# Altium PCB PCB_STM32F401RET6-MINI_2_2022-10-27.pcbdoc
Units mil, origin at the board's own origin, x right, y up, seen from the top; angles counter-clockwise.
Board outline 3639.41 x 2810 mil, 2 copper layers (Top Layer, Bottom Layer); 56 components, 52 nets, 269 pads, 65 vias.
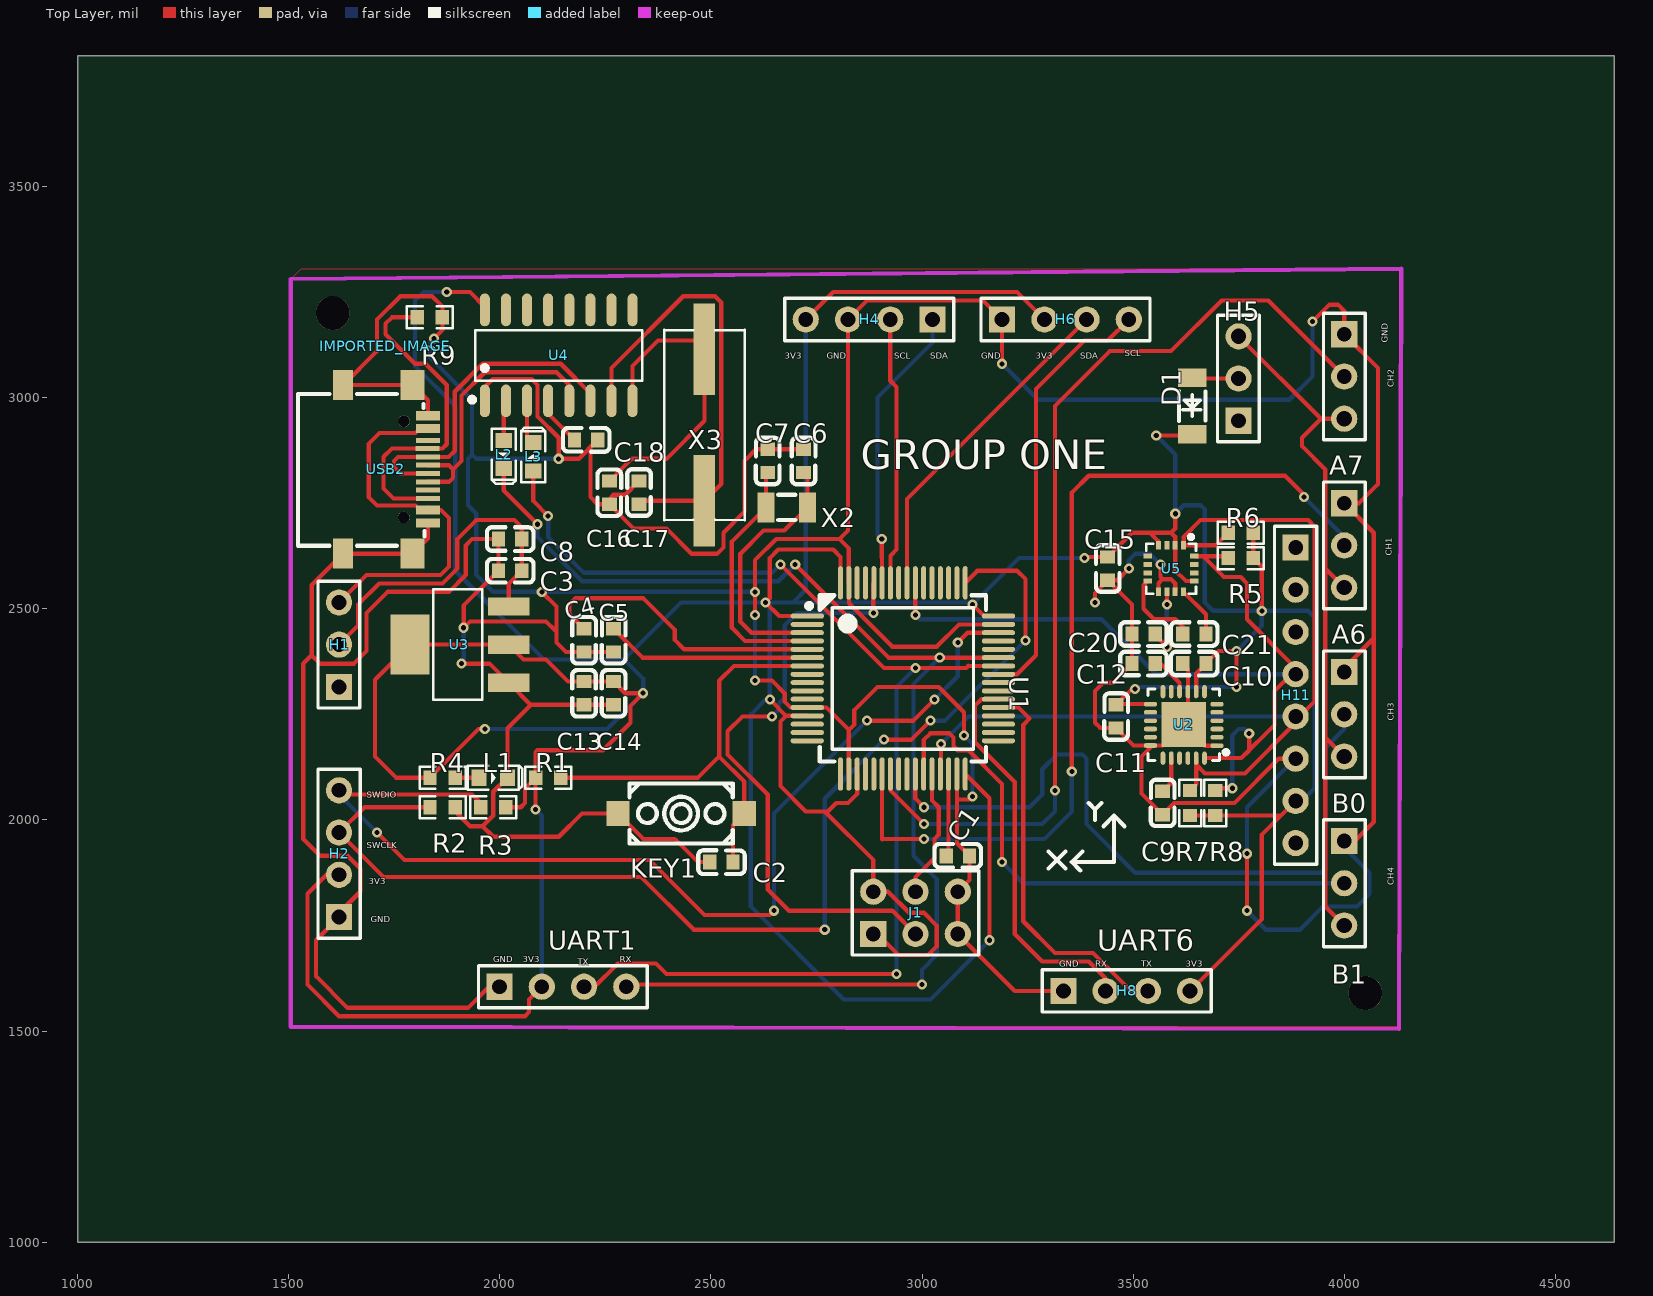
[diagram p0: Top Layer view]
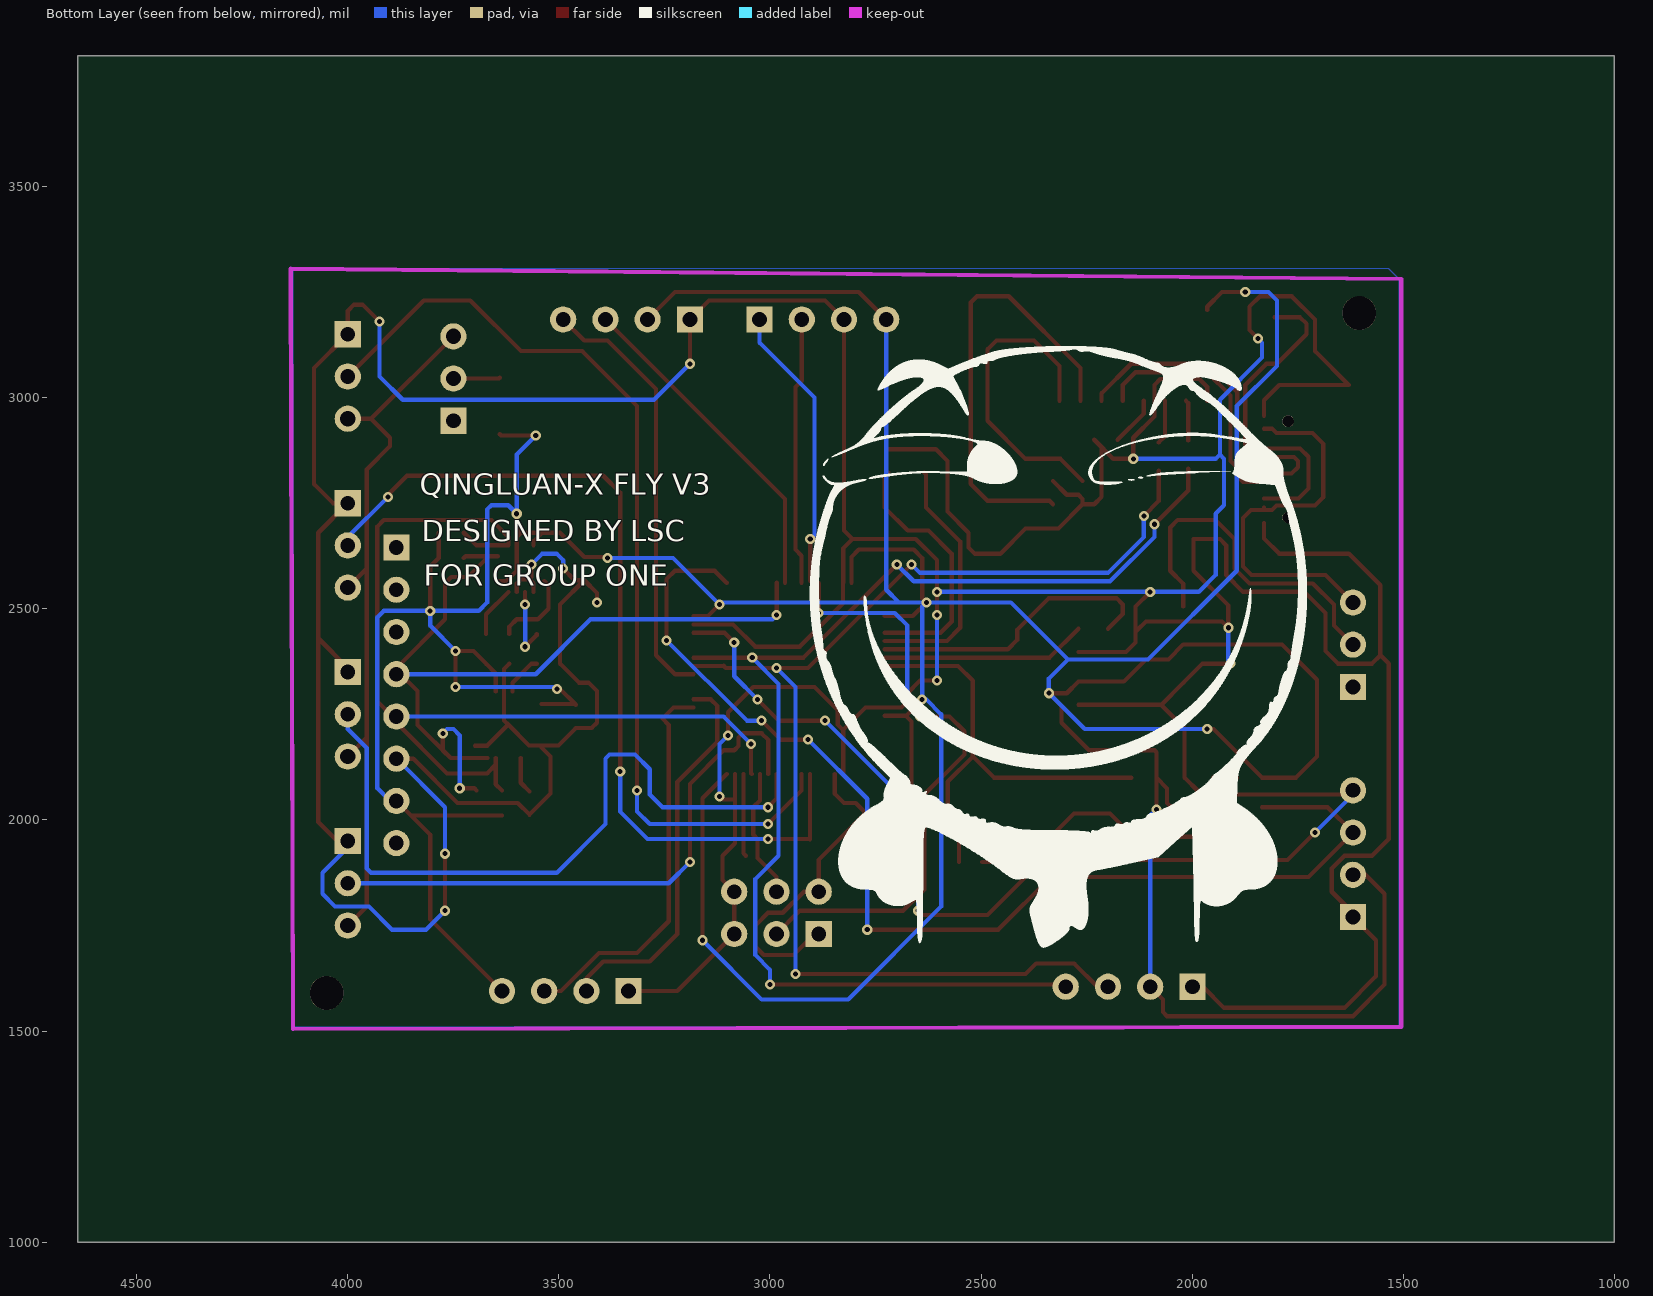
[diagram p1: Bottom Layer view, seen from below]

## Layer stack, top to bottom
Top Layer: signal copper (thickness not stored)
Dielectric: dielectric 12.6, FR-4, Dk 4.8
Bottom Layer: signal copper (thickness not stored)

## Board outline
4639.41,1000 1000,1000 1000,3810 4639.41,3810

## Components (designator, comment, footprint, x,y, rotation, side; value= is the part's Value field where it differs from the comment)
A6 "HDR-F-2.54_1x3" HDR-F-2.54_1X3 3999.41,2650 r270 top
A7 "HDR-F-2.54_1x3" HDR-F-2.54_1X3 3999.41,3050 r270 top
B0 "HDR-F-2.54_1x3" HDR-F-2.54_1X3 3999.41,2250 r270 top
B1 "HDR-F-2.54_1x3" HDR-F-2.54_1X3 3999.41,1850 r270 top
C1 "4.7uF" C0603 3084.41,1915 r0 top
C2 "0.1u" C0603 2524.41,1900 r180 top
C3 "0.1u" C0603 2024.41,2590 r180 top
C4 "22pF" C0603 2199.41,2425 r270 top
C5 "22pF" C0603 2269.41,2425 r270 top
C6 "15pF" C0603 2719.41,2850 r90 top
C7 "15pF" C0603 2634.41,2850 r90 top
C8 "0.1u" C0603 2024.41,2665 r180 top
C9 "2.2nF" C0603 3569.41,2040 r270 top
C10 "10nF" C0603 3644.41,2370 r0 top
C11 "0.1u" C0603 3459.41,2245 r90 top
C12 "0.1u" C0603 3524.41,2370 r0 top
C13 "0.1u" C0603 2199.41,2300 r90 top
C14 "0.1u" C0603 2269.41,2300 r90 top
C15 "0.1u" C0603 3439.41,2595 r270 top
C16 "22pF" C0603 2259.41,2775 r90 top
C17 "22pF" C0603 2329.41,2775 r270 top
C18 "0.1u" C0603 2204.41,2900 r180 top
C20 "4.7uF" C0603 3524.41,2440 r0 top
C21 "0.22uF" C0603 3644.41,2440 r0 top
D1 "ZMM3V3" LL-34_L3.5-W1.5-RD 3639.41,2980 r90 top
H1 "HDR-F-2.54_1x3" HDR-F-2.54_1X3 1619.41,2415 r90 top
H2 "HDR-F-2.54_1x4" HDR-F-2.54_1X4 1619.41,1920 r90 top
H4 "HDR-F-2.54_1x4" HDR-F-2.54_1X4 2874.41,3185 r180 top
H5 "HDR-F-2.54_1x3" HDR-F-2.54_1X3 3749.41,3045 r90 top
H6 "HDR-F-2.54_1x4" HDR-F-2.54_1X4 3339.41,3185 r0 top
H8 "HDR-F-2.54_1x4" HDR-F-2.54_1X4 3484.41,1595 r0 top
H11 "HDR-F-2.54_1x8" HDR-F-2.54_1X8 3884.41,2345 r270 top
IMPORTED_IMAGE "IMPORTED_IMAGE" IMPORTED_IMAGE 1728.19,3121.78 r0 top
J1 "HDR-M-2.54_2x3" HDR-M-2.54_2X3 2884.41,1730 r0 top
KEY1 "K2-3.6×6.1_SMD" KEY-SMD_2P-L6.2-W3.6-LS8.0 2429.41,2015 r180 top
L1 "LED-0603_R" LED0603_RED 1984.41,2100 r0 top
L2 "LED-0603_B" LED0603_BLUE 2009.41,2865 r270 top
L3 "LED-0603_G" LED0603_GREEN 2079.41,2860 r90 top
R1 "100k" R0603 2114.41,2100 r0 top
R2 "10k" R0603 1864.41,2030 r180 top
R3 "10k" R0603 1984.41,2030 r180 top
R4 "1k" R0603 1864.41,2100 r0 top
R5 "2.2K" R0603 3754.41,2620 r0 top
R6 "2.2k" R0603 3754.41,2680 r0 top
R7 "4.7k" R0603 3634.41,2040 r270 top
R8 "4.7k" R0603 3694.41,2040 r270 top
R9 "5.1k" R0603 1834.41,3190 r0 top
U1 "STM32F401RET6" LQFP-64_L10.0-W10.0-P0.50-LS12.0-BL 2954.41,2335 r270 top
U2 "MPU6050-YJLTY" QFN-24_L4.0-W4.0-P0.50-BL-EP2.7 3619.41,2225 r90 top
U3 "AMS1117-3.3" SOT-223-3_L6.5-W3.4-P2.30-LS7.0-BR 1904.41,2415 r0 top
U4 "CH340G" SOIC-16_L9.9-W3.9-P1.27-LS6.0-BL 2139.41,3100 r0 top
U5 "HMC5883L" LPCC-16_L3.0-W3.0-P0.50-BL 3589.41,2595 r180 top
UART1 "HDR-F-2.54_1x4" HDR-F-2.54_1X4 2149.41,1605 r0 top
USB2 "TYPEC-304S-ACP16" USB-C-SMD_TYPEC-304S-ACP16 1729.41,2830 r270 top
X2 "32.768kHz" FC-135R_L3.2-W1.5 2679.41,2740 r0 top
X3 "12MHz" HC-49S_L11.4-W4.8 2484.41,2935 r90 top

## Footprints (in the part's own frame and the unit in brackets; to place one, negate y for a bottom-side part, rotate by r counter-clockwise, add the part's x,y. Pads: shape width x height; smd on the part's side, far side on the other; paste and mask are expansions set on the pad)
C0603 [mm]
  rect 0.8x0.9 smd: 1(-0.7,0) 2(0.7,0)
  silkscreen extent -1.41,-0.71 1.39,0.72
FC-135R_L3.2-W1.5 [mm]
  rect 1x1.8 smd: 1(-1.25,0) 2(1.25,0)
  silkscreen extent -0.51,-0.76 0.51,0.76
HC-49S_L11.4-W4.8 [mm]
  rect 5.5x1.3 smd: 1(-4.553,0) 2(4.553,0)
  silkscreen extent -5.71,-2.41 5.71,2.41
HDR-F-2.54_1X3 [mil]
  rect 62x62 hole 35: 1(-100,0)
  round 62 hole 35: 2(0,0)
  round 62 hole 36: 3(100,0)
  silkscreen extent -150,-49 150,50
HDR-F-2.54_1X4 [mil]
  rect 62x62 hole 35: 1(-150,0)
  round 62 hole 35: 2(-50,0) 3(50,0) 4(150,0)
  silkscreen extent -200,-50 200,50
HDR-F-2.54_1X8 [mil]
  rect 62x62 hole 35: 1(-300,0)
  round 62 hole 35: 2(-200,0) 3(-100,0) 4(0,0) 5(100,0) 6(200,0) 7(300,0) 8(400,0)
  silkscreen extent -350,-50 450,50
HDR-M-2.54_2X3 [mil]
  rect 62x62 hole 35: 1(0,0)
  round 62 hole 35: 2(0,100) 3(100,0) 4(100,100) 5(200,0) 6(200,100)
  silkscreen extent -50,-50 250,150
IMPORTED_IMAGE [mil]
KEY-SMD_2P-L6.2-W3.6-LS8.0 [mm]
  rect 1.4x1.5 smd: 1(-3.8,0) 2(3.8,0)
  silkscreen extent -3.1,-1.8 3.1,1.8
LED0603_BLUE [mm]
  rect 0.9x1 smd: 1(-0.85,0) 2(0.85,0)
  silkscreen extent -1.54,-0.73 1.75,0.73
LED0603_GREEN [mm]
  rect 0.9x1 smd: 1(-0.85,0) 2(0.85,0)
  silkscreen extent -1.54,-0.73 1.75,0.73
LED0603_RED [mm]
  rect 0.9x1 smd: 1(-0.85,0) 2(0.85,0)
  silkscreen extent -1.54,-0.73 1.75,0.73
LL-34_L3.5-W1.5-RD [mm]
  rect 1.1x1.7 smd: 1(-1.7,0) 2(1.7,0)
  silkscreen extent -0.9,-0.8 0.9,0.8
LPCC-16_L3.0-W3.0-P0.50-BL [mm]
  rect 0.3x0.5 smd: 1(-0.749,-1.4) 2(-0.249,-1.4) 3(0.251,-1.4) 4(0.751,-1.4) 9(0.75,1.4) 10(0.25,1.4) 11(-0.25,1.4) 12(-0.751,1.4)
  rect 0.5x0.3 smd: 5(1.4,-0.748) 6(1.4,-0.248) 7(1.4,0.252) 8(1.4,0.752) 13(-1.4,0.752) 14(-1.4,0.252) 15(-1.4,-0.248) 16(-1.4,-0.748)
  silkscreen extent -1.5,-2.02 1.5,1.5
LQFP-64_L10.0-W10.0-P0.50-LS12.0-BL [mm]
  oval 0.3x2 smd: 1(-3.75,-5.75) 2(-3.25,-5.75) 3(-2.75,-5.75) 4(-2.25,-5.75) 5(-1.75,-5.75) 6(-1.25,-5.75) 7(-0.75,-5.75) 8(-0.25,-5.75) 9(0.25,-5.75) 10(0.75,-5.75) 11(1.25,-5.75) 12(1.75,-5.75) 13(2.25,-5.75) 14(2.75,-5.75) 15(3.25,-5.75) 16(3.75,-5.75) 33(3.75,5.75) 34(3.25,5.75) 35(2.75,5.75) 36(2.25,5.75) 37(1.75,5.75) 38(1.25,5.75) 39(0.75,5.75) 40(0.25,5.75) 41(-0.25,5.75) 42(-0.75,5.75) 43(-1.25,5.75) 44(-1.75,5.75) 45(-2.25,5.75) 46(-2.75,5.75) 47(-3.25,5.75) 48(-3.75,5.75)
  oval 2x0.3 smd: 17(5.75,-3.75) 18(5.75,-3.25) 19(5.75,-2.75) 20(5.75,-2.25) 21(5.75,-1.75) 22(5.75,-1.25) 23(5.75,-0.75) 24(5.75,-0.25) 25(5.75,0.25) 26(5.75,0.75) 27(5.75,1.25) 28(5.75,1.75) 29(5.75,2.25) 30(5.75,2.75) 31(5.75,3.25) 32(5.75,3.75) 49(-5.75,3.75) 50(-5.75,3.25) 51(-5.75,2.75) 52(-5.75,2.25) 53(-5.75,1.75) 54(-5.75,1.25) 55(-5.75,0.75) 56(-5.75,0.25) 57(-5.75,-0.25) 58(-5.75,-0.75) 59(-5.75,-1.25) 60(-5.75,-1.75) 61(-5.75,-2.25) 62(-5.75,-2.75) 63(-5.75,-3.25) 64(-5.75,-3.75)
  silkscreen extent -5,-5.79 5,5
QFN-24_L4.0-W4.0-P0.50-BL-EP2.7 [mm]
  oval 0.28x0.8 smd: 1(-1.25,-2) 2(-0.75,-2) 3(-0.25,-2) 4(0.25,-2) 5(0.75,-2) 6(1.25,-2) 13(1.25,2) 14(0.75,2) 15(0.25,2) 16(-0.25,2) 17(-0.75,2) 18(-1.242,2)
  oval 0.8x0.28 smd: 7(2,-1.25) 8(2,-0.75) 9(2,-0.25) 10(2,0.25) 11(2,0.75) 12(2,1.25) 19(-2,1.25) 20(-2,0.75) 21(-2,0.25) 22(-2,-0.25) 23(-2,-0.75) 24(-2,-1.25)
  rect 2.7x2.7 smd: 25(0.012,0)
  silkscreen extent -2.14,-2.79 2.16,2.15
R0603 [mil]
  rect 31.75x34.02 smd: 1(-29.65,0) 2(29.66,0)
  silkscreen extent -55,-26 55,26
SOIC-16_L9.9-W3.9-P1.27-LS6.0-BL [mil]
  oval 23.7x77.6 smd: 1(-175,-107.7) 2(-125,-107.7) 3(-75,-107.7) 4(-25,-107.7) 5(25,-107.7) 6(75,-107.7) 7(125,-107.7) 8(175,-107.7) 9(175,107.7) 10(125,107.7) 11(75,107.7) 12(25,107.7) 13(-25,107.7) 14(-75,107.7) 15(-125,107.7) 16(-175,107.7)
  silkscreen extent -211,-111 198,60
SOT-223-3_L6.5-W3.4-P2.30-LS7.0-BR [mm]
  rect 2.5x1.1 smd: 1(2.97,-2.3) 2(2.97,0) 3(2.97,2.3)
  rect 2.34x3.6 smd: 4(-2.97,0)
  silkscreen extent -1.57,-3.33 1.37,3.33
USB-C-SMD_TYPEC-304S-ACP16 [mm]
  rect 1.8x1.45 smd: 13(-5.07,1.632) 14(5.07,1.632)
  rect 1.8x1.2 smd: 15(-5.07,-2.548) 16(5.07,-2.548)
  rect 0.55x1.45 smd: A1B12(-3.225,2.547) A4B9(-2.45,2.547) B1A12(3.22,2.547) B4A9(2.45,2.547)
  rect 0.3x1.45 smd: A5(-1.26,2.532) A6(-0.25,2.547) A7(0.25,2.547) A8(1.25,2.547) B5(1.75,2.547) B6(0.75,2.547) B7(-0.75,2.547) B8(-1.75,2.547)
  round 0.7 hole 0.7 unplated: ""(-2.89,1.103) ""(2.89,1.103)
  silkscreen extent -4.54,-5.26 4.6,2.35

## Free pads (board coordinates)
  round 80 hole 80 unplated: ""(1604.41,3200) ""(4049.41,1590)

## Via types
v1: diameter 24, hole 12, Top Layer to Bottom Layer, tented both sides, 65 vias

## Nets (pads, with @x,y where several pads share a name; then routed paths per layer and width w, separated by ;. In a path a pad name is that pad's centre, name@x,y a point inside that pad or via, vN(x,y) a via of type N, cw(c..) or ccw(c..) an arc to the next point about the centre after c; other vN are vias at no path point)
3.3V: C10.2 C11.2 C13.2 C14.2 C15.1 D1.1 H2.2 H4.4 H6.2 H8.4 H11.7 J1.1 J1.2 R1.1 R3.1 R4.1 R5.2 R6.2 R7.2 R8.2 U1.1 U1.13 U1.19 U1.32 U1.48 U1.64 U2.8 U2.13 U3.2 U3.4 U4.16 U5.2 U5.4 U5.13 UART1.2 | length 14740.4
  Top Layer w10: H2.2 1589.41,1870 1544.41,1825 1544.41,1610 1619.41,1535 2059.41,1535 2069.41,1545 2069.41,1575 UART1.2 ; v1(1874.41,3250) 1929.41,3250 1964.41,3215 U4.16 ; v1(1964.41,2215) 1949.75,2215 R4.1 1754.41,2100 1704.41,2150 1704.41,2331.93 U3.4 U3.2 2056.33,2380 2109.41,2380 2161.85,2327.56 C13.2 C14.2 2296.97,2300 v1(2339.41,2300) 2309.41,2270 2309.41,2230 2244.41,2165 2089.41,2165 2084.75,2160.34 R1.1 2059.41,2074.66 2059.41,2040 2049.41,2030 R3.1 ; v1(2084.41,2025) R1.1@2084.71,2100 ; v1(2639.41,2285) 2677.99,2246.42 ; H4.4 2789.41,3250 3224.41,3250 H6.2 ; U1.13 2677.99,2246.42 ; U1.1 2661.77,2482.64 v1(2629.41,2515) 2639.41,2525 2639.41,2620 2659.41,2640 2789.41,2640 2806.77,2622.64 U1.64 ; 2772.98,2016.43 2796.55,2040 2824.41,2040 2846.14,2061.73 U1.19 ; J1.1 2894.41,1730 2944.41,1680 3014.41,1680 3034.41,1700 3034.41,1750 3004.41,1780 2969.41,1780 2919.41,1830 J1.2 2884.41,1905 2769.41,2020 2724.41,2020 2664.41,2080 2664.41,2232.84 2677.99,2246.42 ; U1.32 3159.41,2051.27 v1(3159.41,1715) ; v1(3119.41,2510) 3146.77,2482.64 U1.48 ; v1(3384.41,2620) 3386.97,2622.56 C15.1 3496.85,2680 3539.41,2680 ; v1(3504.41,2310) 3496.85,2310 C11.2 3461.06,2274.21 U2.13 ; v1(3554.41,2910) 3636.34,2910 D1.1 ; U5.4 3559.83,2659.58 3539.41,2680 ; v1(3599.41,2725) 3599.41,2690 3589.41,2680 ; H8.4 3804.41,1765 3804.41,1965 3849.75,2010.34 ; R7.2 R8.2 3849.75,2010.34 ; U5.13 3624.81,2565.4 3599.21,2590.2 U5.2 3599.2,2670.21 3589.41,2680 ; U2.8 3648.94,2346.97 C10.2 3701.97,2400 v1(3744.41,2400) v1(3744.41,2315) ; R6.2 R5.2 3804.3,2599.77 v1(3804.3,2495) ; H11.7 3849.75,2010.34 ; 3539.41,2680 3589.41,2680
  Bottom Layer w10: v1(1874.41,3250) 1819.41,3250 1799.41,3230 1799.41,3075 1894.41,2980 1894.41,2590 2104.41,2380 2294.41,2380 ; v1(1964.41,2215) 2254.41,2215 v1(2339.41,2300) 2339.41,2335 2294.41,2380 ; v1(2084.41,2025) 2099.41,2010 UART1.2 ; H4.4 2724.41,2545 2694.41,2515 v1(2629.41,2515) ; v1(3159.41,1715) 3019.41,1575 2814.41,1575 2594.41,1795 2594.41,2250 2629.41,2285 v1(2639.41,2285) 2639.41,2505 v1(2629.41,2515) ; v1(3384.41,2620) 3229.41,2620 v1(3119.41,2510) 3119.41,2515 v1(2629.41,2515) ; v1(3504.41,2310) 3509.41,2315 v1(3744.41,2315) ; v1(3554.41,2910) 3599.41,2865 v1(3599.41,2725) 3619.41,2745 3659.41,2745 3669.41,2735 3669.41,2515 3689.41,2495 v1(3804.3,2495) ; v1(3744.41,2400) 3804.3,2459.89 v1(3804.3,2495) ; H11.7 3899.41,2045 3929.41,2075 3929.41,2480 3914.41,2495 v1(3804.3,2495) ; 2294.41,2380 2429.41,2515 v1(2629.41,2515)
5V: C3.1 C8.1 H1.2 U3.3 | length 831.9
  Top Layer w10: H1.2 1664.41,2460 1664.41,2510 1714.41,2560 1864.41,2560 1899.41,2595 1899.41,2665 1944.41,2710 2034.41,2710 2051.97,2692.44 C8.1 C3.1 2021.33,2559.36 U3.3
BOOT0: J1.3 U1.60 | length 1449
  Top Layer w10: v1(2644.41,2245) 2574.41,2245 2539.41,2210 2539.41,2155 2634.41,2060 2634.41,1835 2684.41,1785 2929.41,1785 J1.3 ; v1(2884.41,2490) 2884.41,2560.27 U1.60
  Bottom Layer w10: v1(2644.41,2245) 2660.77,2261.36 2660.77,2276.36 2674.41,2290 2674.41,2460 2704.41,2490 v1(2884.41,2490)
BOOT1: J1.4 U1.28 | length 308.1
  Top Layer w10: J1.4 2984.41,1865 3029.41,1910 3029.41,1955 3039.41,1965 3039.41,2030 3023.31,2046.1 U1.28
C16_2: C16.2 U4.8 X3.2 | length 739.4
  Top Layer w10: C16.2 2311.81,2855 2394.41,2855 2484.41,2945 X3.2 ; U4.8 2314.41,3075 2374.41,3135 2463.66,3135 X3.2@2484.41,3114.25
C17_2: C17.2 U4.7 X3.1 | length 1058.6
  Top Layer w10: U4.7 2264.41,3070 2434.41,3240 2509.41,3240 2524.41,3225 2524.41,2795.75 2484.41,2755.75 2337.72,2755.75 C17.2
C18_2: C18.2 U4.4 | length 118.2
  Top Layer w10: U4.4 2114.41,2962.44 C18.2@2176.85,2900
CC: R9.1 USB2.A5 USB2.B5 | length 793.9
  Top Layer w10: R9.1 1744.41,3190 1729.41,3175 1729.41,3150 1799.41,3080 1824.41,3080 1874.41,3030 1874.41,2889.61 1864.41,2879.61 USB2.A5 1744.81,2879.6 1724.41,2860 1724.41,2785 1748.31,2761.1 USB2.B5
CH1: A6.2 U1.22 | length 2130.4
  Top Layer w10: U1.22 2905.2,1954.21 2905.99,1955 v1(3004.41,1955) ; v1(3354.41,2115) 3354.41,2775 3394.41,2815 3859.41,2815 3904.41,2770 v1(3904.41,2765)
  Bottom Layer w10: v1(3004.41,1955) 3289.41,1955 3354.41,2020 v1(3354.41,2115) ; v1(3904.41,2765) 3999.41,2670 A6.2
CH2: A7.2 U1.23 | length 2297.1
  Top Layer w10: U1.23 2924.88,2069.53 v1(3004.41,1990) ; v1(3314.41,2070) 3314.41,2980 3444.41,3110 3589.41,3110 3709.41,3230 3819.41,3230 A7.2
  Bottom Layer w10: v1(3004.41,1990) 3284.41,1990 3314.41,2020 v1(3314.41,2070)
CH3: B0.2 U1.26 | length 1718.6
  Top Layer w10: U1.26 2983.94,2050.47 v1(3004.41,2030)
  Bottom Layer w10: v1(3004.41,2030) 3254.41,2030 3284.41,2060 3284.41,2120 3319.41,2155 3379.41,2155 3389.41,2145 3389.41,1990 3504.41,1875 3944.41,1875 3954.41,1885 3954.41,2170 3999.41,2215 B0.2
CH4: B1.2 U1.27 | length 1350
  Top Layer w10: U1.27 3003.62,2189.21 3019.41,2205 3029.41,2205 3064.41,2205 3074.41,2195 3074.41,2175 3084.41,2165 3109.41,2165 3189.41,2085 v1(3189.41,1900)
  Bottom Layer w10: v1(3189.41,1900) 3239.41,1850 B1.2
D+: U4.5 USB2.A6 USB2.B6 | length 665
  Top Layer w10: USB2.B6 1879.88,2800.47 1889.41,2810 1889.41,2830 ; USB2.A6 1879.57,2839.84 1889.41,2830 ; 1889.41,2823.6 1889.41,2830 ; U4.5 2164.41,3030 2134.41,3060 1964.41,3060 1909.41,3005 1909.41,2850 1889.41,2830
D-: U4.6 USB2.A7 USB2.B7 | length 790.3
  Top Layer w10: USB2.A7 1764.61,2820.2 1749.41,2835 1749.41,2850 1758.91,2859.5 USB2.B7 1878.91,2859.5 1893.31,2873.9 1893.31,3013.9 1959.41,3080 2144.41,3080 2214.41,3010 U4.6
DIN: A6.3 A7.3 B0.3 B1.3 H5.3 | length 1718.1
  Top Layer w10: H5.3 3944.41,2950 ; B1.3 3954.41,1795 3954.41,2195 ; B0.3 3954.41,2195 ; A6.3 3954.41,2595 ; A7.3 3944.41,2950 ; 3944.41,2950 3899.41,2905 3899.41,2885 3954.41,2830 3954.41,2595 ; 3954.41,2195 3954.41,2595
GND: A6.1 A7.1 B0.1 B1.1 C1.2 C2.2 C3.2 C4.2 C5.2 C6.2 C7.2 C8.2 C9.2 C10.1 C11.1 C12.1 C13.1 C14.1 C15.2 C16.1 C17.1 C18.1 C20.1 H2.1 H4.3 H6.1 H8.1 H11.6 J1.5 J1.6 KEY1.2 L1.2 R2.1 R9.2 U1.12 U1.18 U1.31 U1.47 U1.63 U2.1 U2.9 U2.18 U2.25 U3.1 U4.1 U5.9 U5.11 UART1.1 USB2.13 USB2.14 USB2.15 USB2.16 USB2.A1B12 USB2.B1A12 | length 17678.9
  Top Layer w10: USB2.B1A12 1829.7,2666.41 USB2.14 USB2.16 1554.41,2555.69 1554.41,2390 ; USB2.A1B12 1829.7,2993.59 USB2.13 USB2.15 1709.41,3109.9 1709.41,3185 1764.41,3240 1839.41,3240 1864.07,3215.34 R9.2 ; v1@1839.41,3140 v1(1844.41,3140) 1864.41,3160 R9.2 ; R2.1 1894.07,2020.34 1929.41,1985 1959.41,1985 ; v1(1909.41,2370) 1975.79,2370 U3.1 2073.34,2272.44 ; U4.1 1964.41,3025 1983.34,3043.93 2075.48,3043.93 2089.41,3030 2089.41,2955 2139.41,2905 v1(2139.41,2855) 2186.97,2855 C18.1 2214.41,2882.44 2214.41,2765 2231.97,2747.44 C16.1 ; UART1.1 1974.41,1605 1924.41,1555 1639.41,1555 1564.41,1630 1564.41,1715 H2.1 1619.41,1780 1669.41,1830 1669.41,1885 1639.41,1915 1574.41,1915 1534.41,1955 1534.41,2370 1554.41,2390 ; v1(2099.41,2540) 2134.41,2505 2134.41,2420 2156.97,2397.44 C4.2 C5.2 ; 2134.41,2449.06 2130.35,2449.06 2109.41,2470 1929.41,2470 v1(1914.41,2455) 1914.41,2507.56 1996.85,2590 1996.85,2665 1934.41,2665 1919.41,2650 1919.41,2580 1879.41,2540 1734.41,2540 1684.41,2490 1684.41,2400 1654.41,2370 1574.41,2370 1554.41,2390 ; C14.1 C13.1 2073.34,2272.44 ; C17.1 2296.85,2770 2269.41,2770 2259.41,2760 C16.1 ; C2.2@2496.85,1900 2469.41,1900 2414.41,1955 2339.81,1955 KEY1.2 2194.41,2015 2139.41,1960 1984.41,1960 1959.41,1985 ; v1(2604.41,2330) 2644.41,2330 2674.41,2300 2674.41,2280 2688.31,2266.1 U1.12 2773.31,2266.1 2826.46,2212.95 ; v1(2604.41,2485) v1(2604.41,2540) 2604.41,2615 2654.41,2665 2804.41,2665 ; C6.2 C7.2 2606.97,2877.56 2579.41,2850 2579.41,2730 2529.41,2680 2529.41,2645 2514.41,2630 2454.41,2630 2394.41,2690 2316.85,2690 C16.1 ; U1.18 2826.46,2212.95 ; U1.63 2826.46,2642.95 2804.41,2665 ; U1.63 2826.51,2512.9 2929.41,2410 3034.41,2410 3087.31,2462.9 U1.47@3180.81,2462.9 ; 3082.36,2048.14 3112.55,2048.14 v1(3119.41,2055) ; U1.31 3082.36,1944.61 C1.2 3111.97,1857.56 J1.6 J1.5 3219.41,1595 H8.1 ; v1(3099.41,2200) 3099.41,2255 3039.41,2315 2894.41,2315 2839.41,2260 2839.41,2225.9 2826.46,2212.95 ; v1(3189.41,3080) H6.1 3144.41,3230 2869.41,3230 H4.3 2824.41,2685 2804.41,2665 ; v1(3409.41,2515) 3409.41,2537.44 C15.2 ; v1(3489.41,2595) 3461.85,2567.44 C15.2 ; U5.9 3559.91,2560.5 3569.41,2570 ; v1(3564.41,2605) 3564.41,2575 3569.41,2570 ; U5.11@3599.21,2539.9 3599.21,2559.9 3589.41,2570 3569.41,2570 ; C10.1@3616.85,2370 3629.25,2357.6 U2.9 3629.25,2235.33 U2.25 ; U2.1 3669.11,2175.79 U2.25 ; v1(3769.41,1785) v1(3769.41,1920) ; H11.6 3844.41,2145 3739.41,2040 3596.97,2040 C9.2 3519.41,2062.44 3519.41,2150 3540.67,2171.26 U2.18 ; v1(3924.41,3180) 3964.41,3220 3984.41,3220 3999.41,3205 A7.1 4079.41,3070 4079.41,2795 4034.41,2750 A6.1 4069.41,2680 4069.41,2430 ; B1.1 4024.41,1950 4069.41,1995 4069.41,2430 ; B0.1 3999.41,2360 4069.41,2430 ; 1959.41,1985 1984.41,2010 1984.41,2066.54 L1.2 2017.87,2216.97 2073.34,2272.44 ; C15.2 3496.85,2510 3496.85,2440 3496.85,2370 3451.85,2325 3429.41,2325 3409.41,2305 3409.41,2230 3421.97,2217.44 C11.1 3500.75,2176.1 U2.18 ; U2.18 3570.02,2176.1 U2.25
  Bottom Layer w10: v1(1844.41,3140) 1834.41,3130 1834.41,3095 1934.41,2995 1934.41,2865 ; v1(1909.41,2370) 1914.41,2375 v1(1914.41,2455) ; v1(2139.41,2855) 1944.41,2855 1934.41,2865 ; v1(2604.41,2330) v1(2604.41,2485) ; v1(2604.41,2540) v1(2099.41,2540) 1984.41,2540 1944.41,2580 1944.41,2725 1924.41,2745 1924.41,2855 1934.41,2865 ; v1(3099.41,2200) 3119.41,2180 v1(3119.41,2055) ; v1(3189.41,3080) 3274.41,2995 3869.41,2995 3924.41,3050 v1(3924.41,3180) ; v1(3489.41,2595) 3489.41,2615 3504.41,2630 3539.41,2630 v1(3564.41,2605) ; v1(3769.41,1785) 3814.41,1740 3894.41,1740 3949.41,1795 4029.41,1795 4059.41,1825 4059.41,1875 3999.41,1935 B1.1 ; v1(3769.41,1920) 3769.41,2030 H11.6
H5_2: D1.2 H5.2 | length 110.8
  Top Layer w10: D1.2 3641.34,3045 H5.2
I2C1_SCL: H4.2 U1.58 | length 635.9
  Top Layer w10: H4.2 2924.41,3040 2939.41,3025 2939.41,2640 2924.88,2625.47 U1.58
I2C1_SDA: H4.1 U1.59 | length 681.6
  Top Layer w10: v1@2904.41,2670 U1.59@2905.21,2566.4
  Bottom Layer w10: v1(2904.41,2665) 2894.41,2675 2894.41,3000 3024.41,3130 H4.1
I2C2_SCL: H11.5 R6.1 R7.1 U1.29 U2.23 U5.1 | length 2291.4
  Top Layer w10: U1.29 3044.41,2110.05 v1(3044.41,2180) ; R7.1 3648.94,2084.19 U2.23 3648.94,2130.47 3669.41,2110 3764.41,2110 3884.41,2230 H11.5 3894.41,2245 3929.41,2280 3929.41,2695 3914.41,2710 3659.41,2710 3619.41,2670 U5.1 3694.87,2650.12 R6.1
  Bottom Layer w10: v1(3044.41,2180) 3109.41,2245 H11.5
I2C2_SDA: H11.4 R5.1 R8.1 U1.55 U2.24 U5.16 | length 2160.1
  Top Layer w10: v1(2983.94,2485) U1.55 ; U2.24 3755.67,2146.26 ; R8.1 3699.75,2075 v1(3734.41,2075) ; R5.1 3720.3,2624.45 3644.53,2624.45 3664.96,2624.45 3714.41,2575 3754.41,2575 3769.41,2560 3769.41,2475 3884.41,2360 H11.4 3874.41,2345 3834.41,2305 3834.41,2225 3755.67,2146.26 ; v1(3774.41,2205) 3774.41,2165 3755.67,2146.26
  Bottom Layer w10: v1(2983.94,2485) 2993.94,2475 3424.41,2475 3554.41,2345 H11.4 ; v1(3734.41,2075) 3734.41,2200 3749.41,2215 3764.41,2215 v1(3774.41,2205)
I2C3_SCL: H6.4 U1.41 | length 1025.7
  Top Layer w10: U1.41 3224.25,2344.84 3269.41,2390 3269.41,3020 3384.41,3135 3439.41,3135 H6.4
I2C3_SDA: H6.3 U1.56 | length 799.7
  Top Layer w10: U1.56 2964.25,2759.84 H6.3
IN: H1.3 USB2.A4B9 USB2.B4A9 | length 908.3
  Top Layer w10: H1.3 1684.41,2580 1859.41,2580 1879.41,2600 1879.41,2715 1860.87,2733.55 USB2.B4A9 1810.87,2733.54 1800.24,2744.17 1709.41,2744.17 1689.41,2764.17 1689.41,2890 1715.24,2915.83 1800.24,2915.83 1810.86,2926.45 USB2.A4B9@1829.7,2926.45 ; USB2.B4A9 USB2.B4A9@1829.71,2740
LED1_1: L1.1 R4.2 | length 56.9
  Top Layer w10: R4.2 L1.1
LED2_1: L2.1 U4.2 | length 95.9
  Top Layer w10: L2.1 2009.41,2987.3 U4.2
LED3_2: L3.2 U4.3 | length 105.1
  Top Layer w10: U4.3 2064.41,2908.46 L3.2
NRST: C2.1 KEY1.1 R1.2 U1.7 | length 1084.6
  Top Layer w10: R1.2 2469.41,2100 2519.41,2150 ; C2.1 2551.97,1987.96 KEY1.1 2579.01,2090.4 2519.41,2150 ; U1.7 2554.41,2364.53 2519.41,2329.53 2519.41,2150
OSC32IN: C6.1 U1.3 X2.2 | length 620.7
  Top Layer w10: C6.1 2728.62,2813.22 X2.2 2673.63,2685 2624.41,2685 2569.41,2630 2569.41,2470 2596.14,2443.27 U1.3
OSC32OUT: C7.1 U1.4 X2.1 | length 594.3
  Top Layer w10: C7.1 2630.2,2818.22 X2.1 2549.41,2659.21 2549.41,2455 2580.83,2423.58 U1.4
OSCIN: C4.1 U1.5 | length 706
  Top Layer w10: C4.1 2164.41,2487.56 2164.41,2510 2179.41,2525 2339.41,2525 2414.41,2450 2414.41,2426.06 2436.57,2403.9 U1.5
OSCOUT: C5.1 U1.6 | length 486.9
  Top Layer w10: C5.1 2337.76,2384.21 U1.6
S$12144: 
S$12148: 
S$12164: 
S$12171: 
S$12175: 
S$12179: 
S$12187: 
S$12191: 
SETC: C21.2 U5.12 | length 121.8
  Top Layer w10: U5.12 3671.97,2486.87 C21.2
SETP: C21.1 U5.8 | length 197.1
  Top Layer w10: U5.8 3524.41,2555.52 3524.41,2500 3549.41,2475 3599.41,2475 3616.85,2457.56 C21.1@3616.85,2440
SWCLK: H2.3 R2.2 U1.49 | length 2733.3
  Top Layer w10: R2.2 1679.41,2030 H2.3 1724.41,1865 2334.41,1865 2459.41,1740 v1(2769.41,1740) ; v1(2909.41,2190) 2974.41,2190 v1(3019.41,2235) ; U1.49@3102.05,2561.37 3130.68,2590 3224.41,2590 3244.41,2570 v1(3244.41,2425)
  Bottom Layer w10: v1(2769.41,1740) 2769.41,2050 v1(2909.41,2190) ; v1(3019.41,2235) 3054.41,2235 v1(3244.41,2425)
SWDIO: H2.4 R3.2 U1.46 | length 2505.4
  Top Layer w10: H2.4 1629.41,2060 1934.41,2060 1954.75,2039.66 R3.2 ; v1(1709.41,1970) 1774.41,1905 2354.41,1905 2484.41,1775 2639.41,1775 v1(2649.41,1785) ; v1(2869.41,2235) 2979.41,2235 v1(3029.41,2285) ; v1(3084.41,2420) 3107.68,2443.27 U1.46
  Bottom Layer w10: H2.4 1619.41,2060 v1(1709.41,1970) ; v1(2649.41,1785) 2649.41,2015 v1(2869.41,2235) ; v1(3029.41,2285) 3084.41,2340 v1(3084.41,2420)
U1_30: C1.1 U1.30 | length 196
  Top Layer w10: C1.1@3056.85,1915 3062.68,1920.83 U1.30
U2_10: C12.2 U2.10 | length 97.4
  Top Layer w10: C12.2 3564.41,2370 3609.57,2324.84 U2.10
U2_20: C9.1 U2.20 | length 87.2
  Top Layer w10: C9.1 3589.88,2088.03 U2.20
U5_10: C20.2 U5.10 | length 171.3
  Top Layer w10: C20.2 3551.97,2437.44 v1(3579.41,2410) ; v1(3579.41,2510) U5.10
  Bottom Layer w10: v1(3579.41,2410) v1(3579.41,2510)
UART1_RX: L2.2 U1.43 UART1.4 | length 2977
  Top Layer w10: L2.2 2009.41,2780 v1(2089.41,2700) ; UART1.4 2304.41,1610 v1(2999.41,1610) ; v1(2699.41,2605) 2920.2,2384.21 v1(3041.76,2384.21) U1.43
  Bottom Layer w10: v1(2089.41,2700) 2089.41,2670 2194.41,2565 2659.41,2565 v1(2699.41,2605) ; v1(2999.41,1610) 2999.41,1645 3034.41,1680 3034.41,1860 2979.41,1915 2979.41,2321.86 v1(3041.76,2384.21)
UART1_TX: L3.1 U1.42 UART1.3 | length 2901.3
  Top Layer w10: L3.1 2079.41,2755 v1(2114.41,2720) ; UART1.3 2224.41,1605 2279.41,1660 2369.41,1660 2394.41,1635 v1(2939.41,1635) ; v1(2664.41,2605) 2909.41,2360 v1(2984.41,2360) 3104.41,2360 3109.41,2365 U1.42
  Bottom Layer w10: v1(2114.41,2720) 2114.41,2670 2199.41,2585 2644.41,2585 v1(2664.41,2605) ; v1(2939.41,1635) 2939.41,2315 v1(2984.41,2360)
UART6_RX: H8.2 U1.38 | length 930.8
  Top Layer w10: U1.38 3140.21,2285.8 3124.41,2270 3124.41,2185 3219.41,2090 3219.41,1730 3284.41,1665 3394.41,1665 3434.41,1625 H8.2
UART6_TX: H8.3 U1.37 | length 934
  Top Layer w10: U1.37 3228.31,2266.1 3254.41,2240 3239.41,2225 3239.41,1760 3314.41,1685 3404.41,1685 3494.41,1595 H8.3
pads on no net: H1.1 H5.1 H11.1 H11.2 H11.3 H11.8 U1.2 U1.8 U1.9 U1.10 U1.11 U1.14 U1.15 U1.16 U1.17 U1.20 U1.21 U1.24 U1.25 U1.33 U1.34 U1.35 U1.36 U1.39 U1.40 U1.44 U1.45 U1.50 U1.51 U1.52 U1.53 U1.54 U1.57 U1.61 U1.62 U2.2 U2.3 U2.4 U2.5 U2.6 U2.7 U2.11 U2.12 U2.14 U2.15 U2.16 U2.17 U2.19 U2.21 U2.22 U4.9 U4.10 U4.11 U4.12 U4.13 U4.14 U4.15 U5.3 U5.5 U5.6 U5.7 U5.14 U5.15 USB2. USB2.A8 USB2.B8

## Polygon pours and split planes (outlines as drawn)
GND on Bottom Layer (solid): 1509.41,3280 1534.41,3305 4134.41,3305 4129.41,3300 4129.41,1505 4124.41,1510 1509.41,1510
GND on Top Layer (solid): 1504.41,3280 1529.41,3305 4134.41,3305 4129.41,3300 4129.41,1505 4124.41,1510 1504.41,1510

## Silkscreen, mask and mechanical layers (free items; w line width, h text height)
Top Overlay:
  lines w10 net S$12144: 3379.41,1925 3354.41,1900 3454.41,1900
  lines w10 net S$12148: 3354.41,1900 3374.41,1880
  lines w10 net S$12164: 3299.41,1925 3339.41,1885
  lines w10 net S$12171: 3299.41,1885 3339.41,1925
  lines w10 net S$12175: 3479.41,1985 3454.41,2010 ; 3454.41,1900 3454.41,1900 ; 3454.41,1900 3454.41,2010 ; 3454.41,2010 3454.41,2010 ; 3454.41,2010 3429.41,1985 3454.41,2010
  lines w10 net S$12179: 3394.41,2040 3409.41,2025 3409.41,2020
  lines w10 net S$12187: 3409.41,2025 3424.41,2040
  lines w10 net S$12191: 3409.41,2000 3409.41,2025
  text "GND" at 4101.91,3130 h15 r90
  text "SCL" at 3479.41,3097.5 h15
  text "3V3" at 2674.41,3092.5 h15
  text "GND" at 2774.41,3092.5 h15
  text "SCL" at 2934.41,3092.5 h15
  text "SDA" at 3019.41,3092.5 h15
  text "GND" at 3139.41,3092.5 h15
  text "3V3" at 3269.41,3092.5 h15
  text "SDA" at 3374.41,3092.5 h15
  text "CH2" at 4116.91,3025 h15 r90
  text "GROUP ONE" at 2854.41,2830 h70
  text "CH1" at 4111.91,2625 h15 r90
  text "CH3" at 4116.91,2235 h15 r90
  text "SWDIO" at 1684.41,2052.5 h15
  text "SWCLK" at 1684.41,1932.5 h15
  text "3V3" at 1689.41,1847.5 h15
  text "CH4" at 4116.91,1845 h15 r90
  text "GND" at 1694.41,1757.5 h15
  text "UART6" at 3414.41,1690 h50
  text "GND" at 1984.41,1662.5 h15
  text "3V3" at 2054.41,1662.5 h15
  text "RX" at 2284.41,1662.5 h15
  text "TX" at 2184.41,1657.5 h15
  text "GND" at 3324.41,1652.5 h15
  text "RX" at 3409.41,1652.5 h15
  text "TX" at 3519.41,1652.5 h15
  text "3V3" at 3624.41,1652.5 h15
Bottom Overlay:
  text "QINGLUAN-X FLY V3" at 3829.41,2770 h50
  text "DESIGNED BY LSC" at 3824.41,2660 h50
  text "FOR GROUP ONE" at 3819.41,2555 h50